# Altium PCB POG_PIN_Board.PcbDoc
Units mm, origin at the board's own origin, x right, y up, seen from the top; angles counter-clockwise.
Board outline 100 x 100 mm, 4 copper layers (Top Layer, G1, G2, Bottom Layer), stack 1.791 mm thick; 26 components, 2 nets, 223 pads, 0 vias.
Unrouted connection lines stored in the file: 2.
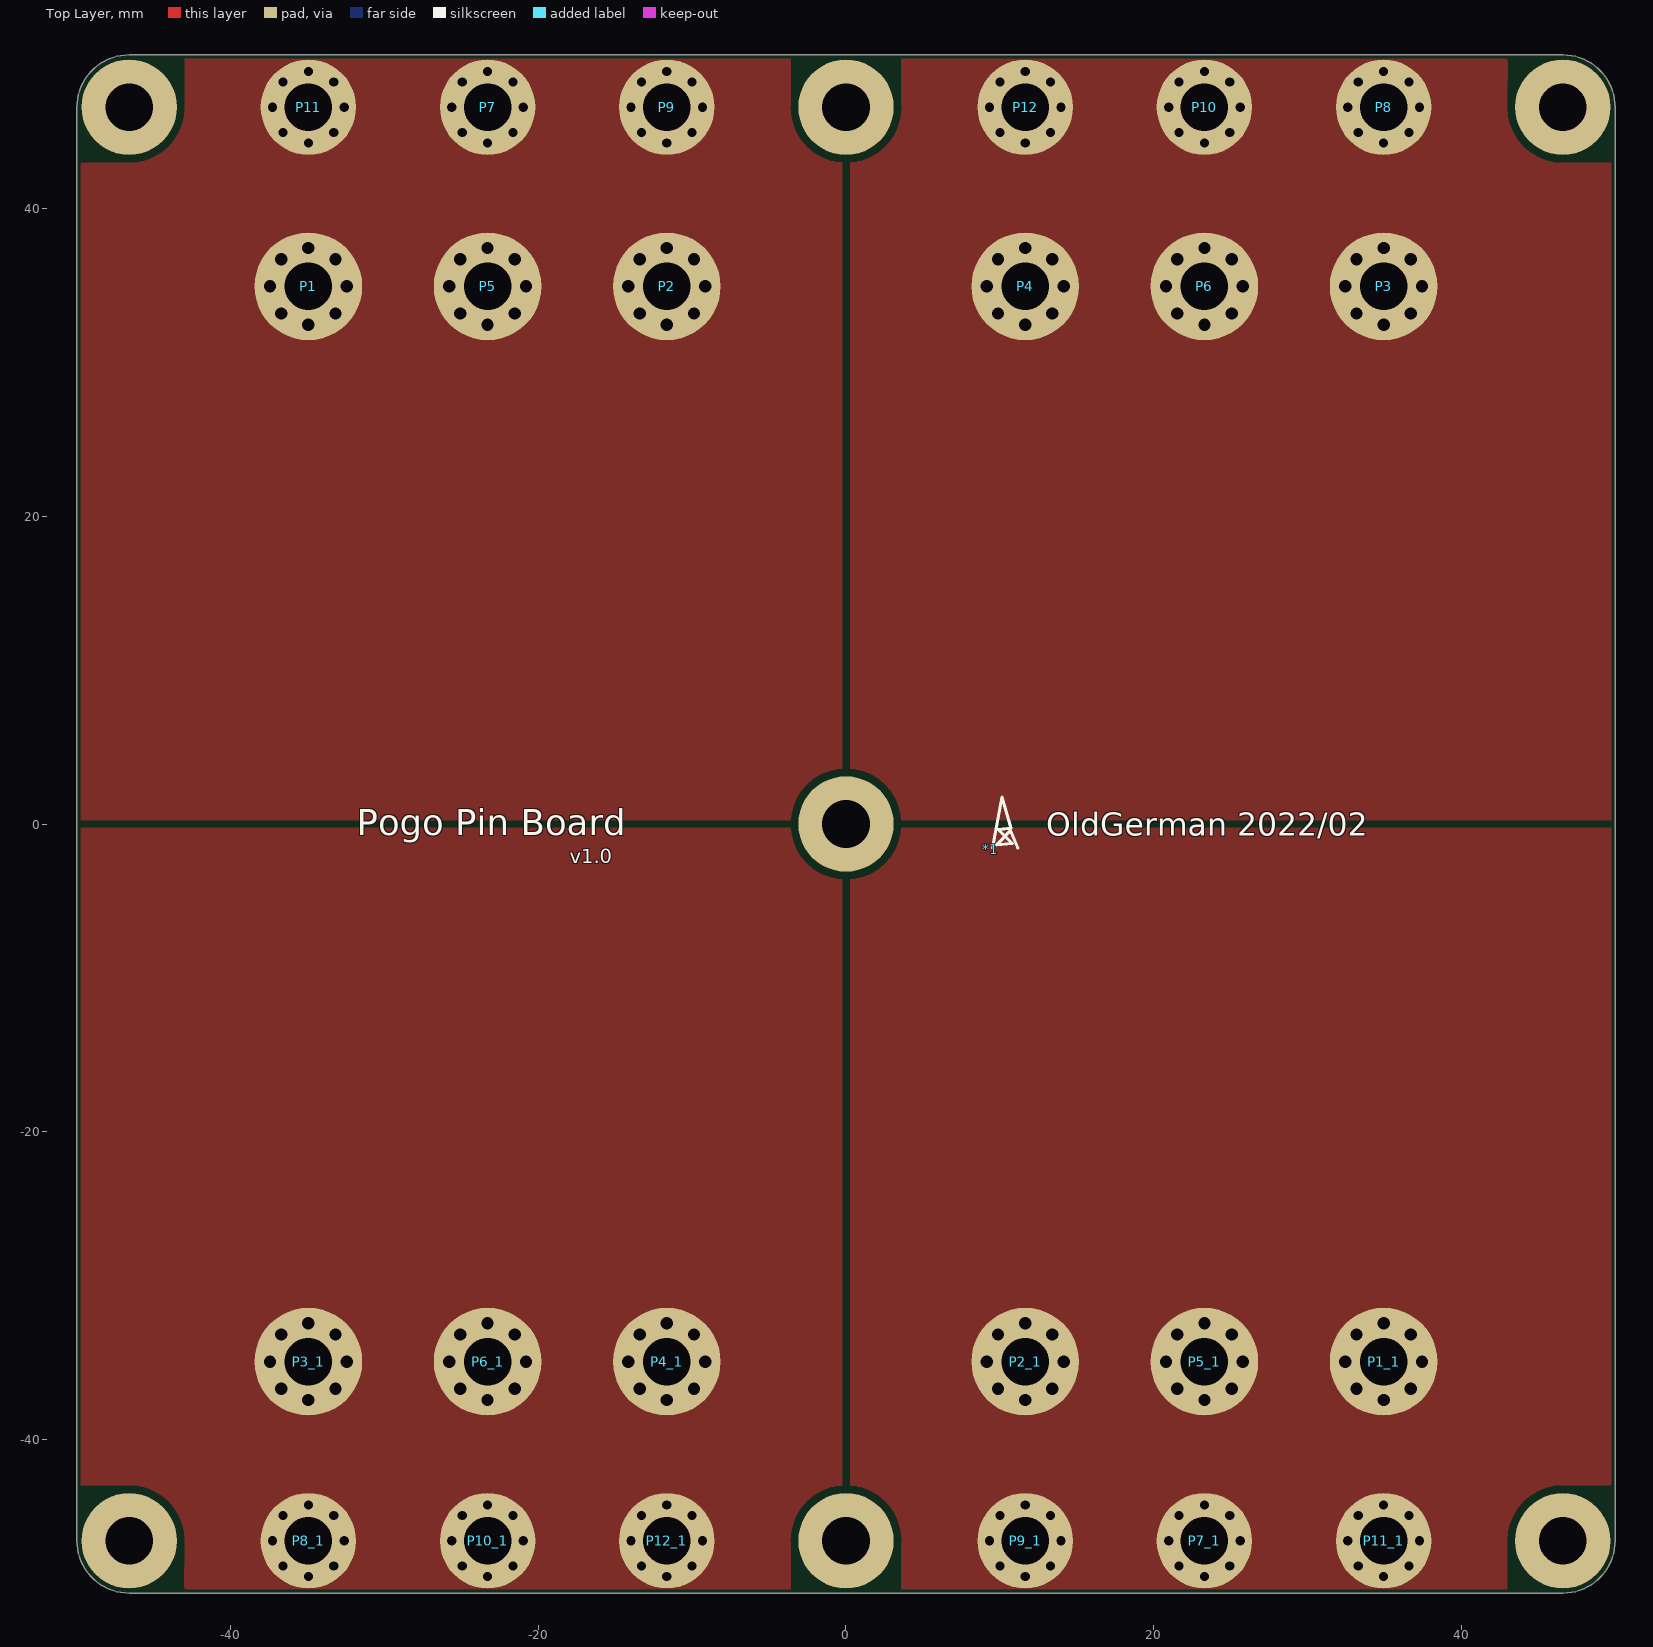
[diagram p0: Top Layer view]
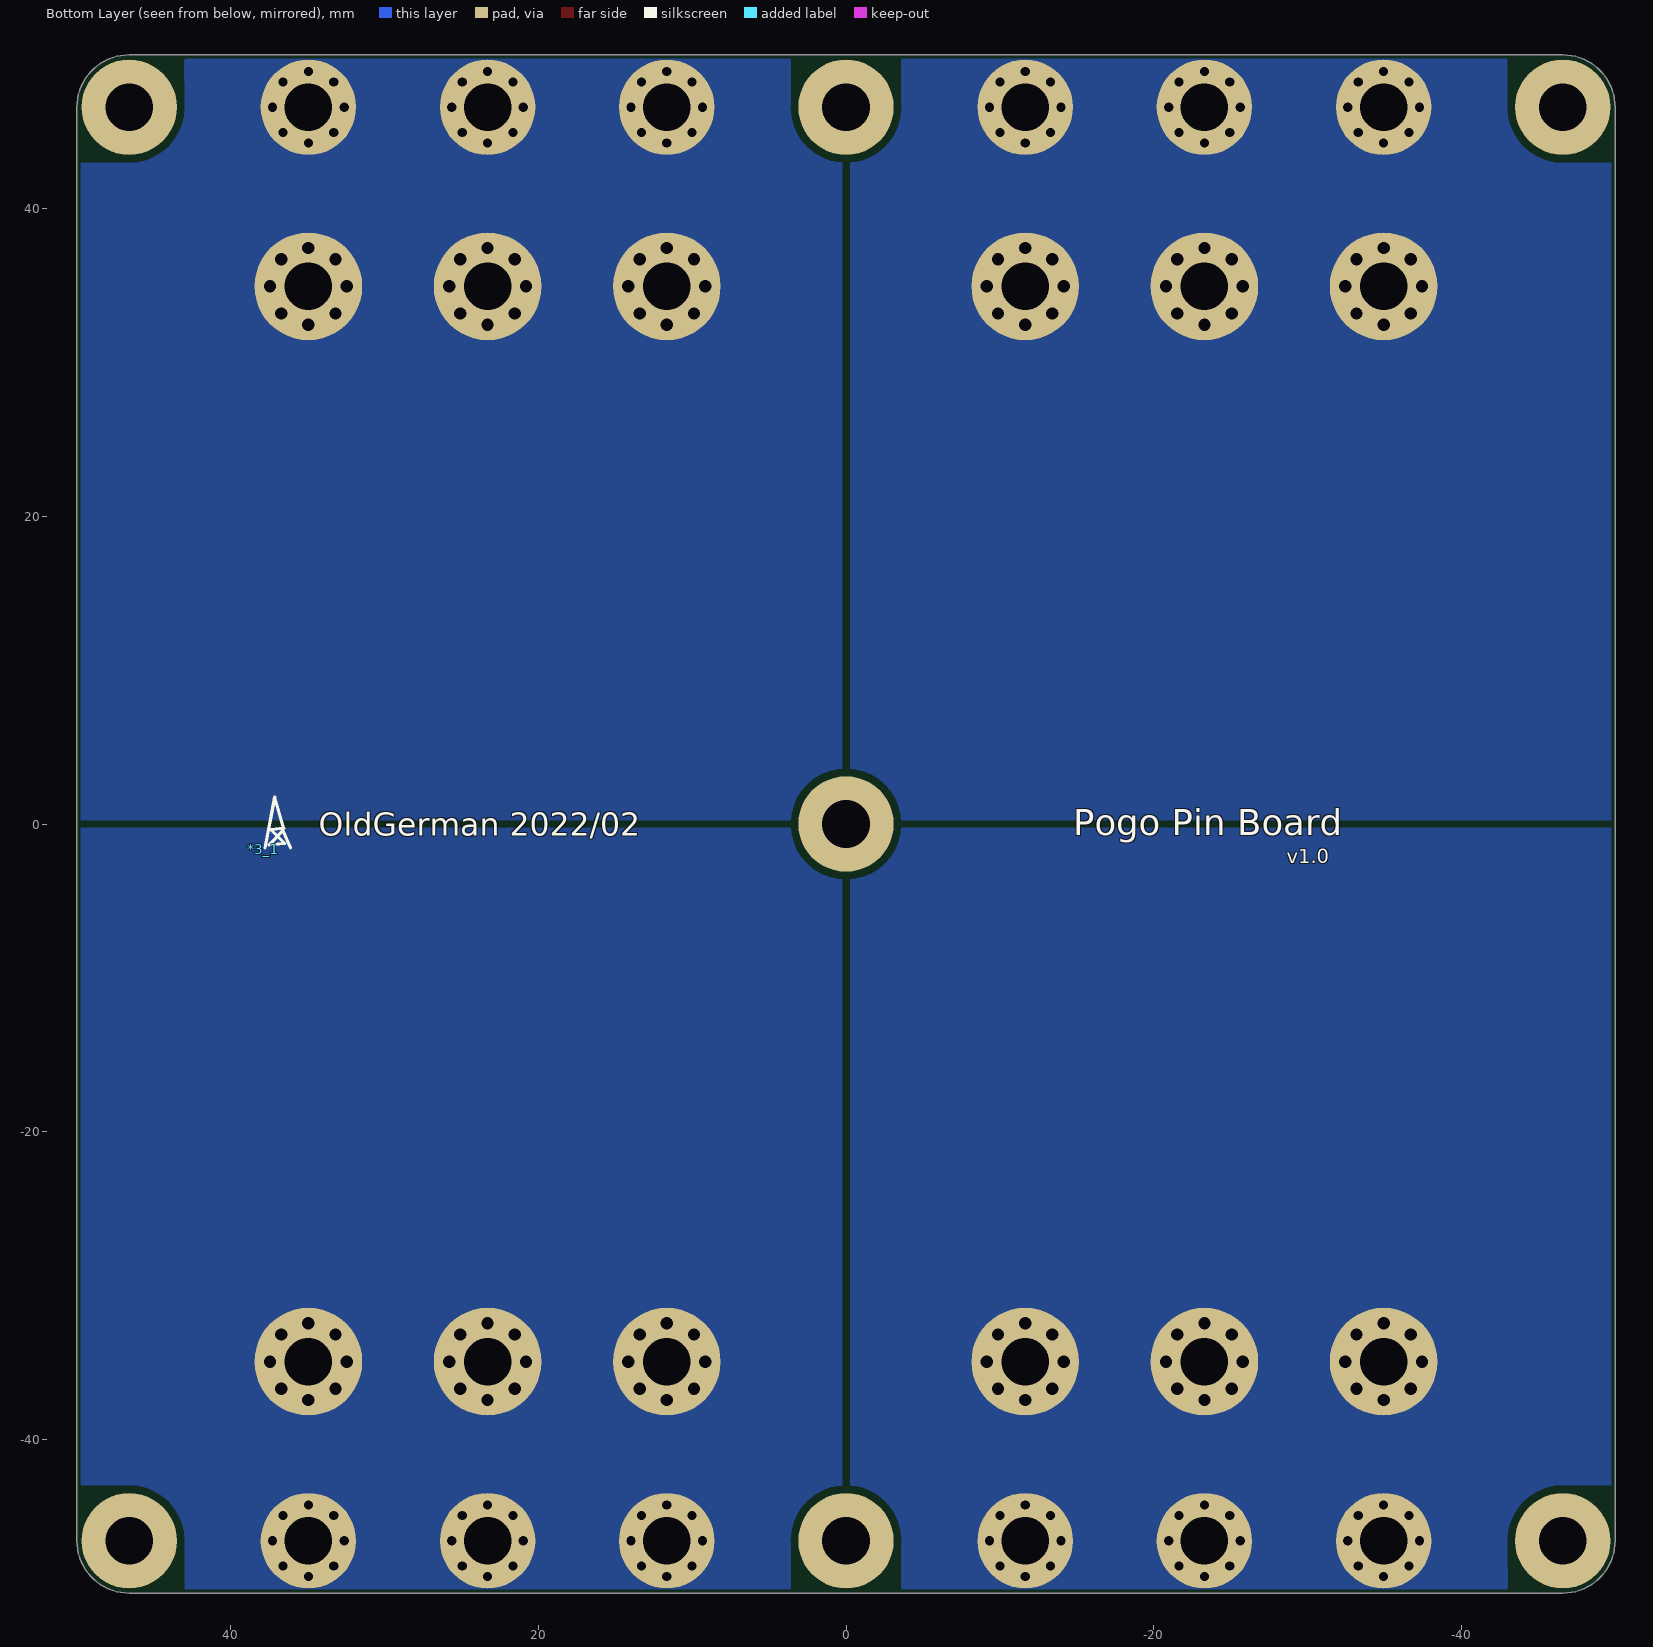
[diagram p1: Bottom Layer view, seen from below]
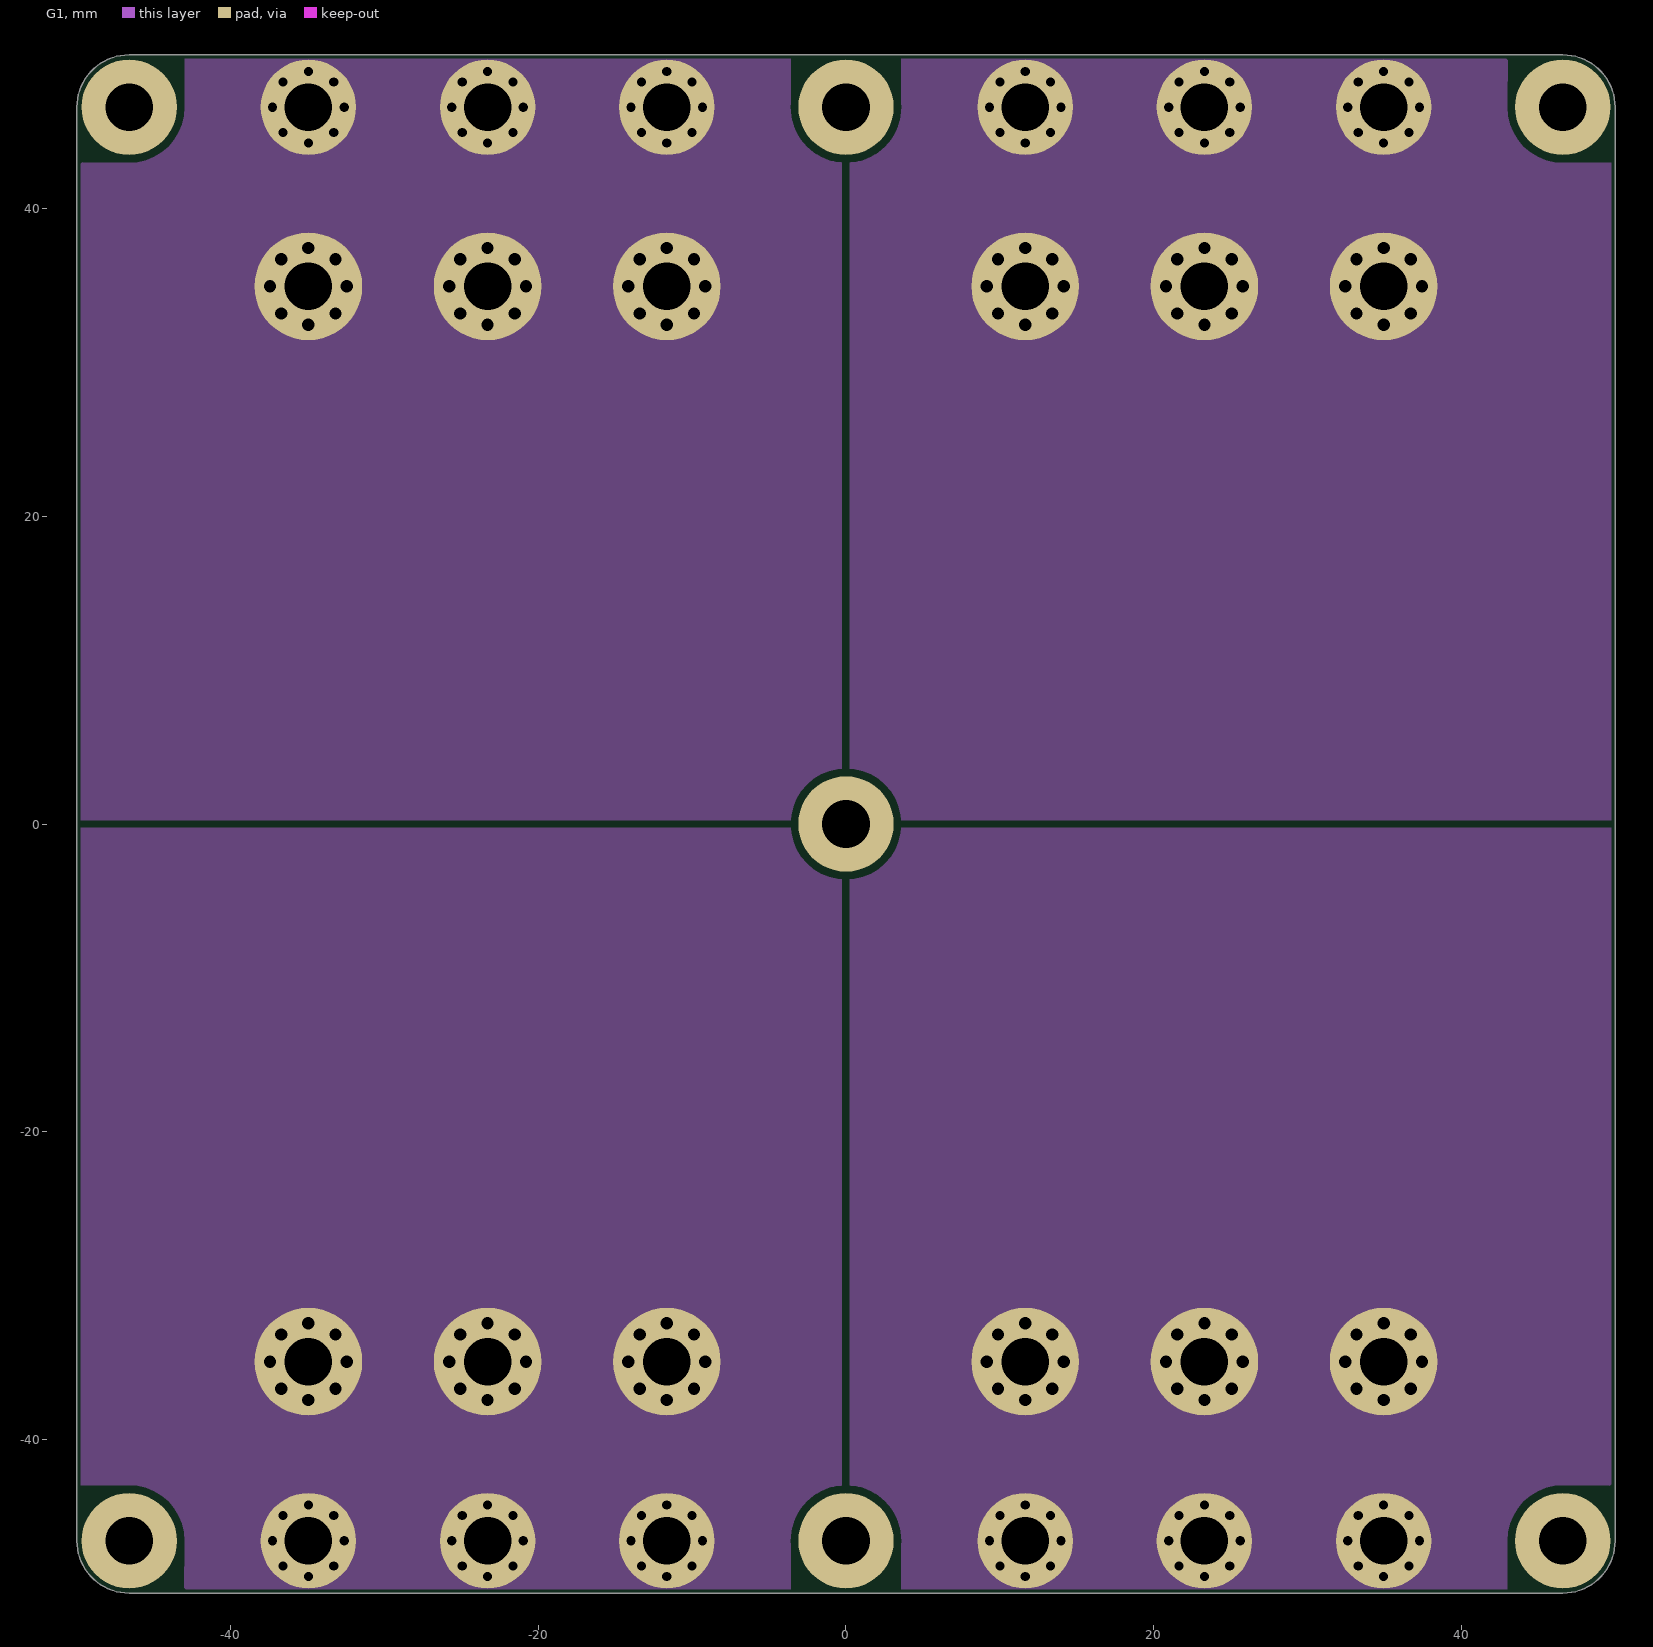
[diagram p2: G1]
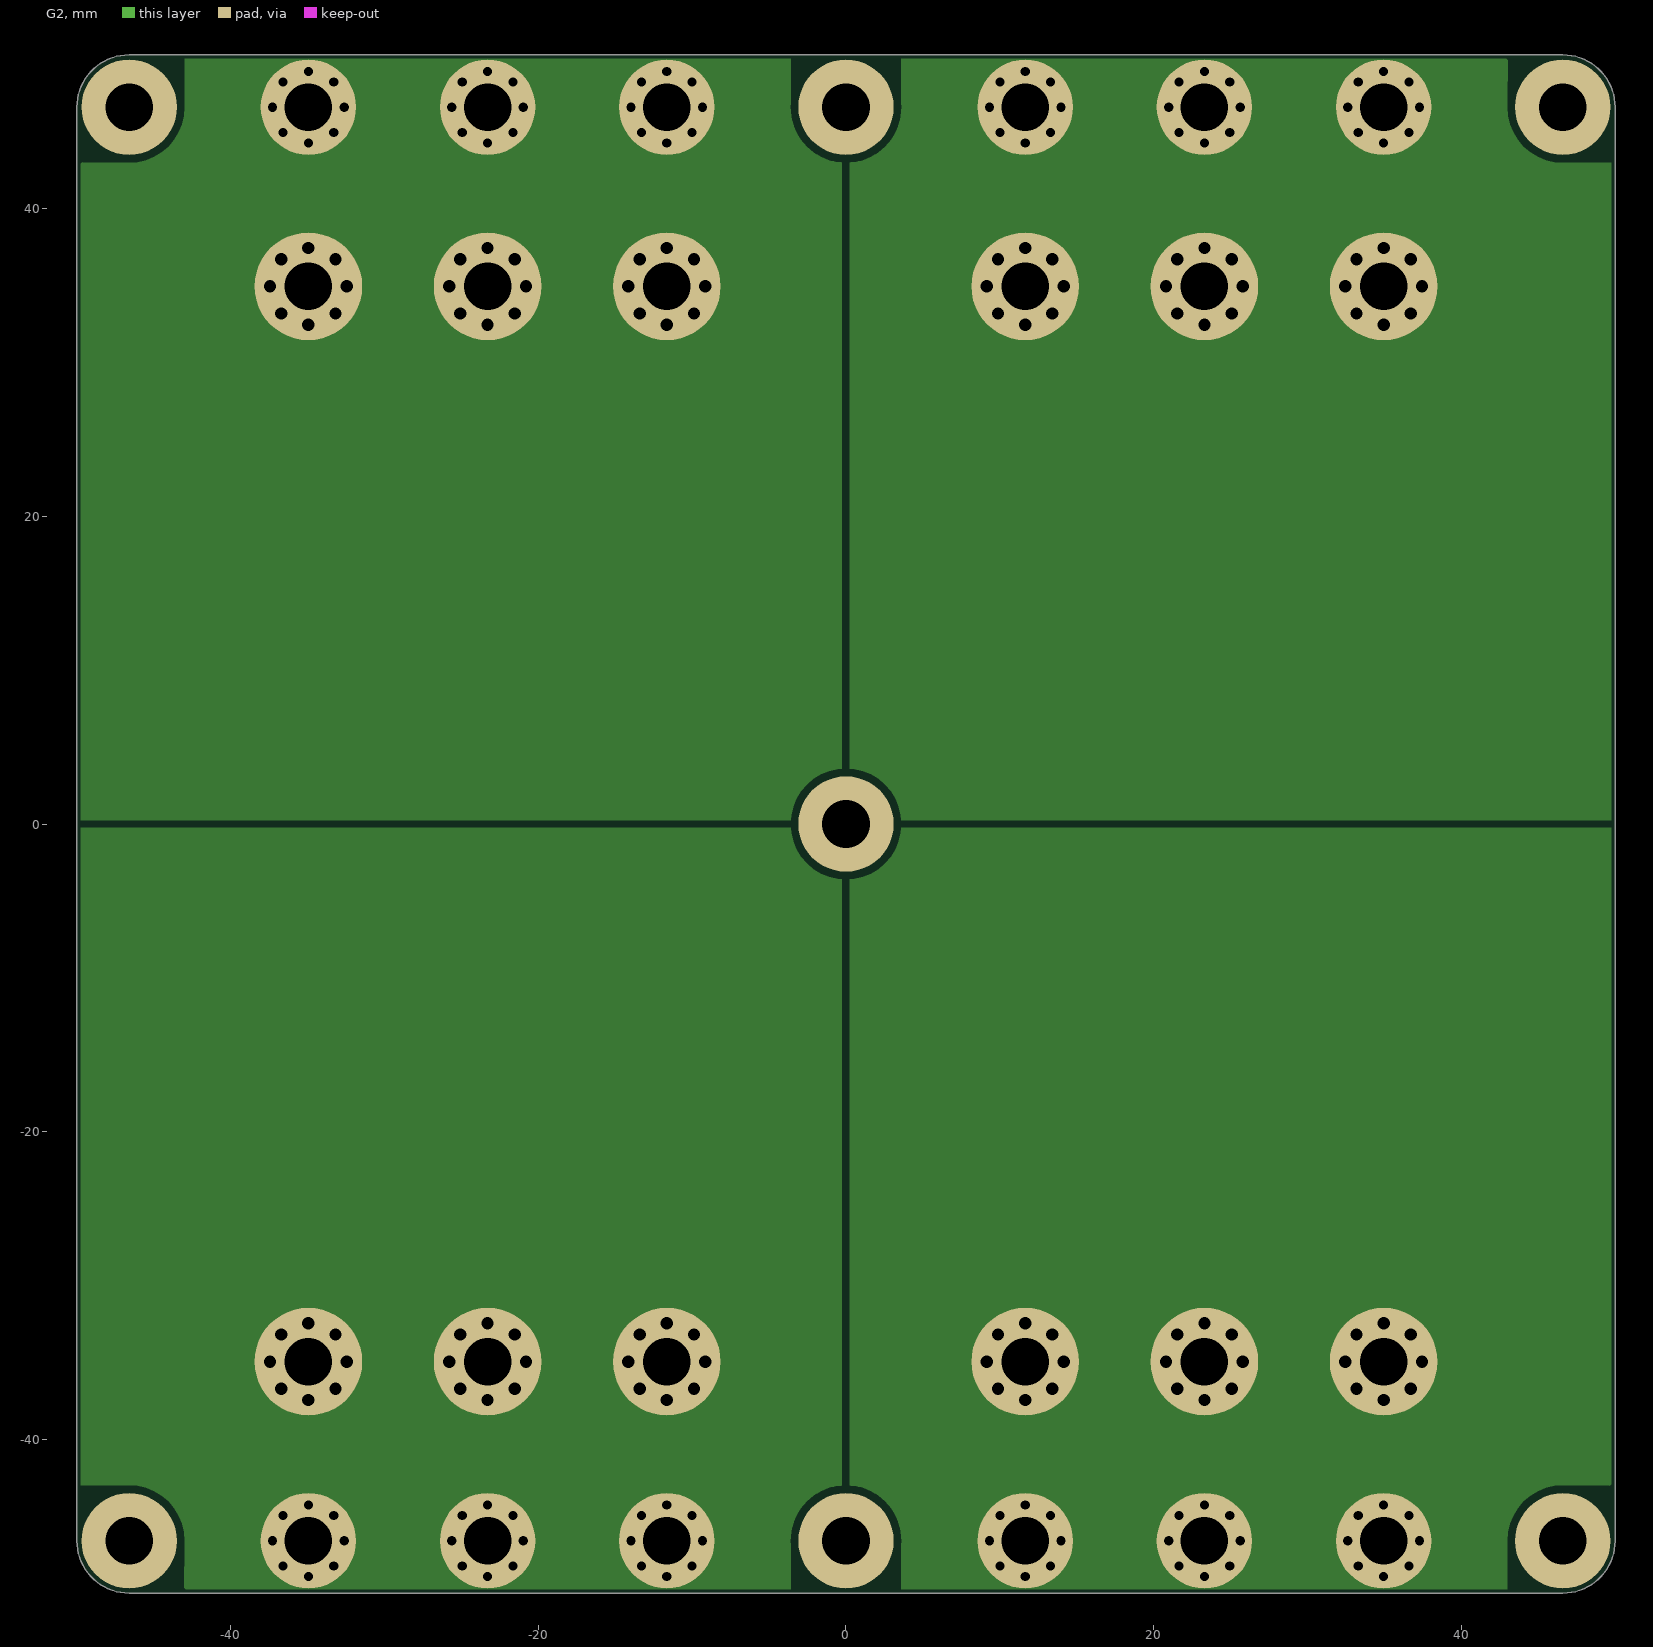
[diagram p3: G2]

## Layer stack, top to bottom
Top Solder: solder mask 0.0102, Solder Resist, Dk 3.5
Top Layer: signal copper 0.0356
Dielectric 2: prepreg 0.0711, PP-006, Dk 4.1
G1: signal copper 0.035
Dielectric 1: dielectric 1.508, FR-4, Dk 4.8
G2: signal copper 0.035
Dielectric 3: prepreg 0.0711, PP-006, Dk 4.1
Bottom Layer: signal copper 0.0356
Bottom Solder: solder mask 0.0102, Solder Resist, Dk 3.5

## Board outline
-50,-46.6 -50,46.6 cw(c-46.6,46.6) -46.6,50 46.6,50 cw(c46.6,46.6) 50,46.6 50,-46.6 cw(c46.6,-46.6) 46.6,-50 -46.6,-50 cw(c-46.6,-46.6)

## Design rules (kind name [scope] priority, off if disabled: settings)
BoardOutlineClearance [All] p1: gap=0.254 ignorepadtopadclearanceinfootprint=FALSE except(0: Arc-SplitContinuation Track-SplitContinuation SMDPad-SplitContinuation THPad-SplitContinuation Via-SplitContinuation Fill-SplitContinuation Poly-SplitContinuation Region-SplitContinuation Text-SplitContinuation)
Clearance [All] p1: gap=0.508 ignorepadtopadclearanceinfootprint=FALSE except(0: Arc-Hole Track-Hole SMDPad-Hole THPad-Hole Via-Hole Fill-Hole Poly-Hole Region-Hole Text-Hole)
PolygonConnect [All] p1: connectstyle=Direct reliefconductorwidth=0.254 reliefentries=4 polygonreliefangle="90 Angle" airgapwidth=0.254
RoutingVias [All] p1: holewidth=0.711 width=1.27 viastyle="Through Hole" minholewidth=0.711 minwidth=1.27 maxholewidth=0.711 maxwidth=1.27
SolderMaskExpansion [All] p1: expansion=0
Width [All] p1: maxlimit=0.254 minlimit=0.254 preferedwidth=0.254
30 further rules are at their usual default settings.

## Classes and differential pairs
component class POG_PIN_Board: P1 P2 P3 P4 P5 P6 P7 P8 P9 P10 P11 P12

## Components (designator, comment, footprint, x,y, rotation, side; value= is the part's Value field where it differs from the comment)
*1 "odg_logo" odg_logo 9.411,-1.651 r0 top
*3_1 "odg_logo" odg_logo 37.875,-1.65 r180 bottom (schematic designator *3)
P1 "CONN_X1" SUN_Hole -34.95,34.95 r0 top
P1_1 "CONN_X1" SUN_Hole 34.95,-34.95 r180 top (schematic designator P1)
P2 "CONN_X1" SUN_Hole -11.65,34.95 r0 top
P2_1 "CONN_X1" SUN_Hole 11.65,-34.95 r180 top (schematic designator P2)
P3 "CONN_X1" SUN_Hole 34.95,34.95 r0 top
P3_1 "CONN_X1" SUN_Hole -34.95,-34.95 r180 top (schematic designator P3)
P4 "CONN_X1" SUN_Hole 11.65,34.95 r0 top
P4_1 "CONN_X1" SUN_Hole -11.65,-34.95 r180 top (schematic designator P4)
P5 "CONN_X1" SUN_Hole -23.3,34.95 r0 top
P5_1 "CONN_X1" SUN_Hole 23.3,-34.95 r180 top (schematic designator P5)
P6 "CONN_X1" SUN_Hole 23.3,34.95 r0 top
P6_1 "CONN_X1" SUN_Hole -23.3,-34.95 r180 top (schematic designator P6)
P7 "CONN_X1" SUN_Hole_medium -23.3,46.6 r0 top
P7_1 "CONN_X1" SUN_Hole_medium 23.3,-46.6 r180 top (schematic designator P7)
P8 "CONN_X1" SUN_Hole_medium 34.95,46.6 r0 top
P8_1 "CONN_X1" SUN_Hole_medium -34.95,-46.6 r180 top (schematic designator P8)
P9 "CONN_X1" SUN_Hole_medium -11.65,46.6 r0 top
P9_1 "CONN_X1" SUN_Hole_medium 11.65,-46.6 r180 top (schematic designator P9)
P10 "CONN_X1" SUN_Hole_medium 23.3,46.6 r0 top
P10_1 "CONN_X1" SUN_Hole_medium -23.3,-46.6 r180 top (schematic designator P10)
P11 "CONN_X1" SUN_Hole_medium -34.95,46.6 r0 top
P11_1 "CONN_X1" SUN_Hole_medium 34.95,-46.6 r180 top (schematic designator P11)
P12 "CONN_X1" SUN_Hole_medium 11.65,46.6 r0 top
P12_1 "CONN_X1" SUN_Hole_medium -11.65,-46.6 r180 top (schematic designator P12)

## Footprints (in the part's own frame and the unit in brackets; to place one, negate y for a bottom-side part, rotate by r counter-clockwise, add the part's x,y. Pads: shape width x height; smd on the part's side, far side on the other; paste and mask are expansions set on the pad)
odg_logo [mm]
  silkscreen extent 0.1,0.1 1.75,3.4
SUN_Hole [mm]
  round 1 hole 0.8: 1(-2.5,0) 1(-1.768,-1.768) 1(-1.768,1.768) 1(0,-2.5) 1(0,2.5) 1(1.768,-1.768) 1(1.768,1.768) 1(2.5,0)
  round 7 hole 3.1: 1(0,0)
SUN_Hole_medium [mm]
  round 1 hole 0.6: 1(-2.325,0) 1(-1.644,-1.644) 1(-1.644,1.644) 1(0,-2.325) 1(0,2.325) 1(1.644,-1.644) 1(1.644,1.644) 1(2.325,0)
  round 6.2 hole 3.1: 1(0,0)

## Free pads (board coordinates)
  round 6.2 hole 3.1: 5(-46.6,-46.6) 5(-46.6,46.6) 5(0,-46.6) 5(0,0) 5(0,46.6) 5(46.6,-46.6) 5(46.6,46.6)

## Nets (pads, with @x,y where several pads share a name; then routed paths per layer and width w, separated by ;. In a path a pad name is that pad's centre, name@x,y a point inside that pad or via, vN(x,y) a via of type N, cw(c..) or ccw(c..) an arc to the next point about the centre after c; other vN are vias at no path point)
Bed+: P1_1.1 P2_1.1 P3.1 P4.1 P5_1.1 P6.1 P7_1.1 P8.1 P9_1.1 P10.1 P11_1.1 P12.1
Bed-: P1.1 P2.1 P3_1.1 P4_1.1 P5.1 P6_1.1 P7.1 P8_1.1 P9.1 P10_1.1 P11.1 P12_1.1

## Polygon pours and split planes (outlines as drawn)
Bed+ on Top Layer "Top Layer-No Net 1" (solid, pour order 18): 50,-50 0.254,-50 0.254,-0.254 50,-0.254
Bed- on Top Layer "Top Layer-No Net" (solid, pour order 16): -50,-0.254 -0.254,-0.254 -0.254,-50 -50,-50
Bed+ on Top Layer "Top Layer-No Net" (solid, pour order 2): 50,0.254 0.254,0.254 0.254,50 50,50
Bed- on Top Layer "Top Layer-No Net 1" (solid, pour order 0): -50,50 -0.254,50 -0.254,0.254 -50,0.254
Bed+ on Bottom Layer "Top Layer-No Net 1" (solid, pour order 20): 50,-50 0.254,-50 0.254,-0.254 50,-0.254
Bed+ on Bottom Layer "Top Layer-No Net" (solid, pour order 12): 50,0.254 0.254,0.254 0.254,50 50,50
Bed- on Bottom Layer "Top Layer-No Net" (solid, pour order 22): -50,-0.254 -0.254,-0.254 -0.254,-50 -50,-50
Bed- on Bottom Layer "Top Layer-No Net 1" (solid, pour order 14): -50,50 -0.254,50 -0.254,0.254 -50,0.254
Bed+ on G1 "Top Layer-No Net 1" (solid, pour order 24): 50,-50 0.254,-50 0.254,-0.254 50,-0.254
Bed- on G1 "Top Layer-No Net" (solid, pour order 26): -50,-0.254 -0.254,-0.254 -0.254,-50 -50,-50
Bed- on G1 "Top Layer-No Net 1" (solid, pour order 30): -50,50 -0.254,50 -0.254,0.254 -50,0.254
Bed+ on G1 "Top Layer-No Net" (solid, pour order 28): 50,0.254 0.254,0.254 0.254,50 50,50
Bed+ on G2 "Top Layer-No Net 1" (solid, pour order 32): 50,-50 0.254,-50 0.254,-0.254 50,-0.254
Bed- on G2 "Top Layer-No Net" (solid, pour order 34): -50,-0.254 -0.254,-0.254 -0.254,-50 -50,-50
Bed+ on G2 "Top Layer-No Net" (solid, pour order 36): 50,0.254 0.254,0.254 0.254,50 50,50
Bed- on G2 "Top Layer-No Net 1" (solid, pour order 38): -50,50 -0.254,50 -0.254,0.254 -50,0.254

## Other copper
Top Layer:
  pour cut-out: 3.6,-46.6 3.6,-50 -3.6,-50 -3.6,-46.6 cw(c0,-46.6)
  pour cut-out: -3.6,46.6 -3.6,50 3.6,50 3.6,46.6 cw(c0,46.6)
  pour cut-out: 50,-43.017 46.6,-43 ccw(c46.6,-46.6) 43,-46.6 43,-50 50,-50
  pour cut-out: -43.017,-50 -43,-46.6 ccw(c-46.6,-46.6) -46.6,-43 -50,-43 -50,-50
  pour cut-out: 43.017,50 43,46.6 ccw(c46.6,46.6) 46.6,43 50,43 50,50
  pour cut-out: -50,43.017 -46.6,43 ccw(c-46.6,46.6) -43,46.6 -43,50 -50,50
G1:
  pour cut-out: -3.6,46.6 -3.6,50 3.6,50 3.6,46.6 cw(c0,46.6)
  pour cut-out: 3.6,-46.6 3.6,-50 -3.6,-50 -3.6,-46.6 cw(c0,-46.6)
  pour cut-out: -50,43.017 -46.6,43 ccw(c-46.6,46.6) -43,46.6 -43,50 -50,50
  pour cut-out: -43.017,-50 -43,-46.6 ccw(c-46.6,-46.6) -46.6,-43 -50,-43 -50,-50
  pour cut-out: 43.017,50 43,46.6 ccw(c46.6,46.6) 46.6,43 50,43 50,50
  pour cut-out: 50,-43.017 46.6,-43 ccw(c46.6,-46.6) 43,-46.6 43,-50 50,-50
G2:
  pour cut-out: -3.6,46.6 -3.6,50 3.6,50 3.6,46.6 cw(c0,46.6)
  pour cut-out: 3.6,-46.6 3.6,-50 -3.6,-50 -3.6,-46.6 cw(c0,-46.6)
  pour cut-out: 43.017,50 43,46.6 ccw(c46.6,46.6) 46.6,43 50,43 50,50
  pour cut-out: -50,43.017 -46.6,43 ccw(c-46.6,46.6) -43,46.6 -43,50 -50,50
  pour cut-out: 50,-43.017 46.6,-43 ccw(c46.6,-46.6) 43,-46.6 43,-50 50,-50
  pour cut-out: -43.017,-50 -43,-46.6 ccw(c-46.6,-46.6) -46.6,-43 -50,-43 -50,-50
Bottom Layer:
  pour cut-out: -3.6,46.6 -3.6,50 3.6,50 3.6,46.6 cw(c0,46.6)
  pour cut-out: 3.6,-46.6 3.6,-50 -3.6,-50 -3.6,-46.6 cw(c0,-46.6)
  pour cut-out: 50,-43.017 46.6,-43 ccw(c46.6,-46.6) 43,-46.6 43,-50 50,-50
  pour cut-out: -43.017,-50 -43,-46.6 ccw(c-46.6,-46.6) -46.6,-43 -50,-43 -50,-50
  pour cut-out: 43.017,50 43,46.6 ccw(c46.6,46.6) 46.6,43 50,43 50,50
  pour cut-out: -50,43.017 -46.6,43 ccw(c-46.6,46.6) -43,46.6 -43,50 -50,50

## Silkscreen, mask and mechanical layers (free items; w line width, h text height)
Top Overlay:
  text "OldGerman 2022/02" at 13.031,-0.77 h1.5
  text "Pogo Pin Board" at -31.815,-1.27 h2.9
  text "v1.0" at -17.95,-2.54 h0.91
Bottom Overlay:
  text "OldGerman 2022/02" at 34.269,-0.77 h1.5
  text "Pogo Pin Board" at -14.785,-1.27 h2.9
  text "v1.0" at -28.65,-2.54 h0.91
Mechanical 1:
  the board outline again, w0.254
Mechanical 15:
  lines w0.254: -34.95,-46.6 -34.95,46.6 ; -23.3,-46.6 -23.3,46.6 ; -11.65,-46.6 -11.65,46.6 ; 0,0 0,46.6 ; 11.65,-46.6 11.65,46.6 ; 23.3,-46.6 23.3,46.6 ; 34.95,-46.6 34.95,46.6 ; -50,43.017 -50,50 -43,50 -43,46.6 cw(c-46.6,46.6) -46.6,43 -50,43.017 ; -46.6,-46.6 -46.6,46.6 46.6,46.6 46.6,-46.6 -46.6,-46.6 ; -3.6,46.6 ccw(c0,46.6) 3.6,46.6 3.6,50 -3.6,50 -3.6,46.6